# Altium PCB ProMicro_NRF52840 V1.2-PCB FootPrint.PcbDoc
Units mil, origin at the board's own origin, x right, y up, seen from the top; angles counter-clockwise.
Board outline 6000 x 4000 mil, 2 copper layers (Top Layer, Bottom Layer); 9 components, 0 nets, 51 pads, 0 vias.
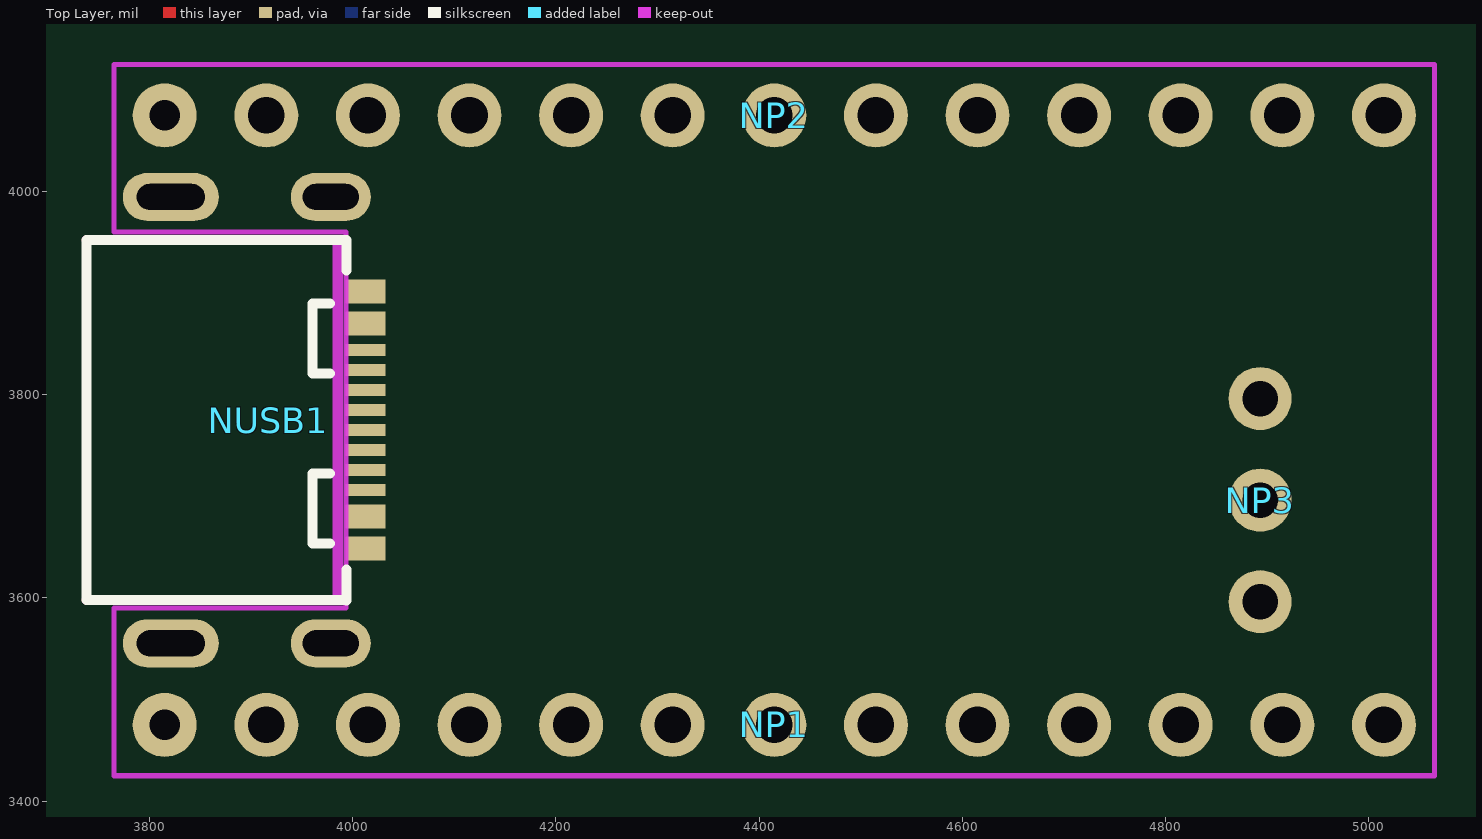
[diagram p0: Top Layer view]
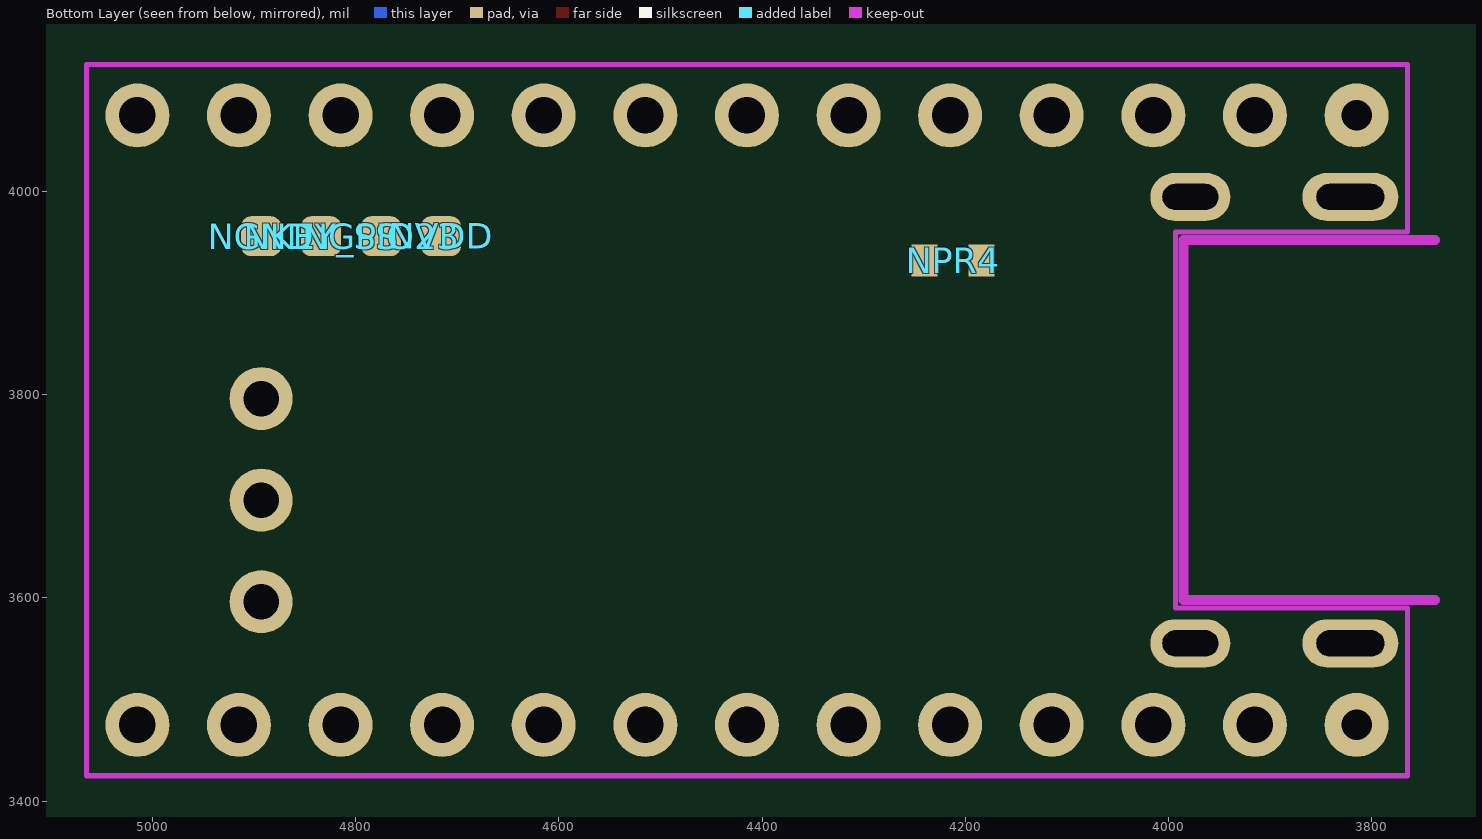
[diagram p1: Bottom Layer view, seen from below]

## Layer stack, top to bottom
Top Solder: solder mask 0.4, Solder Resist, Dk 3.5
Top Layer: signal copper 1.4
Dielectric 1: dielectric 12.6, FR-4, Dk 4.8
Bottom Layer: signal copper 1.4
Bottom Solder: solder mask 0.4, Solder Resist, Dk 3.5

## Board outline
1000,1000 7000,1000 7000,5000 1000,5000

## Design rules (kind name [scope] priority, off if disabled: settings)
Clearance [All] p1: gap=10 ignorepadtopadclearanceinfootprint=FALSE except(0: Arc-Hole Track-Hole SMDPad-Hole THPad-Hole Via-Hole Fill-Hole Poly-Hole Region-Hole Text-Hole)
PolygonConnect [All] p1: connectstyle=Relief reliefconductorwidth=10 reliefentries=4 polygonreliefangle="90 Angle" airgapwidth=10
RoutingVias [All] p1: holewidth=28 width=50 viastyle="Through Hole" minholewidth=28 minwidth=50 maxholewidth=28 maxwidth=50
SolderMaskExpansion [All] p1: expansion=4 istentingtop=FALSE
Width [All] p1: maxlimit=10 minlimit=10 preferedwidth=10
30 further rules are at their usual default settings.

## Components (designator, comment, footprint, x,y, rotation, side; value= is the part's Value field where it differs from the comment)
NGND "Pads（NC）" "MicroBit Pads cs"#1 4893.21,3956.03 r90 bottom
NGPIO23 "Pads（NC）" "MicroBit Pads cs"#2 4775.13,3956.03 r90 top
NKEY_SS "Pads（NC）" "MicroBit Pads cs"#2 4834.15,3956.03 r90 top
NP1 "HEADER 1X13" "1X13  PICO HEADER"#1 4415,3425 r0 top
NP2 "HEADER 1X13" "1X13  PICO HEADER"#2 4415,4125 r180 top
NP3 "Header 3" "Header Z 1x3" 4893.16,3696.26 r90 top
NPR4 "SMD 0603 0R 5%(NC)" 0603 4212,3932 r180 bottom
NUSB1 "TYPE-C 3.1 MT 16P_C168688" USB-C-SMD_TYPE-C-USB-4 3915.3,3775 r270 top
NVDD "Pads（NC）" "MicroBit Pads cs"#1 4716.09,3956.03 r90 bottom

## Footprints (in the part's own frame and the unit in brackets; to place one, negate y for a bottom-side part, rotate by r counter-clockwise, add the part's x,y. Pads: shape width x height; smd on the part's side, far side on the other; paste and mask are expansions set on the pad)
"1X13  PICO HEADER"#1 [mm]
  round 1.6 hole 0.762: 1(-15.24,1.27)
  round 1.6 hole 0.914: 2(-12.7,1.27) 3(-10.16,1.27) 4(-7.62,1.27) 5(-5.08,1.27) 6(-2.54,1.27) 7(0,1.27) 8(2.54,1.27) 9(5.08,1.27) 10(7.62,1.27) 11(10.16,1.27) 12(12.7,1.27) 13(15.24,1.27)
"1X13  PICO HEADER"#2 [mm]
  round 1.6 hole 0.914: 1(-15.24,1.27) 2(-12.7,1.27) 3(-10.16,1.27) 4(-7.62,1.27) 5(-5.08,1.27) 6(-2.54,1.27) 7(0,1.27) 8(2.54,1.27) 9(5.08,1.27) 10(7.62,1.27) 11(10.16,1.27) 12(12.7,1.27)
  round 1.6 hole 0.762: 13(15.24,1.27)
0603 [mm] "Chip Capacitor; Body 1.6 x 0.8 mm (LxW typ)"
  rect 0.65x0.8 smd: 1(-0.712,0) 2(0.712,0)
  body extent -0.64,-0.51 0.64,0.51, height 1.2
"Header Z 1x3" [mil]
  round 62 hole 35: 1(-100,0) 2(0,0) 3(100,0)
"MicroBit Pads cs"#1 [mm]
  rrect50% 1x1 smd: 0(0,0)
"MicroBit Pads cs"#2 [mm]
  rrect50% 1x1 smd far side: 0(0,0)
USB-C-SMD_TYPE-C-USB-4 [mm]
  oval 1.2x2 hole 0.65 slot 1.4 at 90 deg paste+0 mask+0.051: 13(5.58,1.605) 16(-5.58,1.605)
  oval 1.2x2.4 hole 0.65 slot 1.7 at 90 deg paste+0 mask+0.051: 14(5.58,-2.395) 15(-5.58,-2.395)
  rect 0.3x1 smd paste-100 mask+0.051: A5(-1.25,2.47) A6(-0.25,2.47) A7(0.25,2.47) A8(1.25,2.47) B5(1.75,2.47) B6(0.75,2.47) B7(-0.75,2.47) B8(-1.75,2.47)
  rect 0.6x1 smd paste-100 mask+0.051: A9B4(2.41,2.47) A12B1(3.21,2.47) B9A4(-2.41,2.47) B12A1(-3.21,2.47)
  Keep-Out Layer lines w0.254: 4.499,1.78 -4.5,1.78 ; 4.499,1.78 4.499,-4.501 4.499,1.78 ; 4.499,1.78 -4.5,1.78 ; -4.5,1.78 -4.5,-4.501 -4.5,1.78
  silkscreen extent -4.5,-4.5 4.5,2

## Part data
NGND NGPIO23 NKEY_SS NVDD: library part "Microbit Pads"
NP1 NP2: library part "Header 1X13"
NP3: "Header, 3-Pin", LatestRevisionDate=17-Jul-2002, LatestRevisionNote="Re-released for DXP Platform.", Publisher="Altium Limited"
NPR4: library part Res2, "Res", LatestRevisionDate=17-Jul-2002, LatestRevisionNote="Re-released for DXP Platform.", PackageDescription="Axial Device, Thru-Hole; 2 Leads; 0.4 in Pin Spacing", PackageReference=AXIAL-0.4, Published=8-Jun-2000, Publisher="Altium Limited"
NUSB1: Designer=U?, Device="TYPE-C 3.1 MT 16P_C168688", Symbol="TYPE-C 3.1 MT 16P_C168688"

## Nets (pads, with @x,y where several pads share a name; then routed paths per layer and width w, separated by ;. In a path a pad name is that pad's centre, name@x,y a point inside that pad or via, vN(x,y) a via of type N, cw(c..) or ccw(c..) an arc to the next point about the centre after c; other vN are vias at no path point)
pads on no net: NGND.0 NGPIO23.0 NKEY_SS.0 NP1.1 NP1.2 NP1.3 NP1.4 NP1.5 NP1.6 NP1.7 NP1.8 NP1.9 NP1.10 NP1.11 NP1.12 NP1.13 NP2.1 NP2.2 NP2.3 NP2.4 NP2.5 NP2.6 NP2.7 NP2.8 NP2.9 NP2.10 NP2.11 NP2.12 NP2.13 NP3.1 NP3.2 NP3.3 NPR4.1 NPR4.2 NUSB1.13 NUSB1.14 NUSB1.15 NUSB1.16 NUSB1.A5 NUSB1.A6 NUSB1.A7 NUSB1.A8 NUSB1.A9B4 NUSB1.A12B1 NUSB1.B5 NUSB1.B6 NUSB1.B7 NUSB1.B8 NUSB1.B9A4 NUSB1.B12A1 NVDD.0

## Keep-outs
Keep-Out Layer:
  lines w5: 3765,3425 5065,3425 5065,4125 3765,4125 3765,3960.04 3993.35,3960.04 3993.35,3589.96 3765,3589.96 3765,3425